# Altium PCB Mobo.PcbDoc (part 3 of 3)
Units mm, origin at the board's own origin, x right, y up, seen from the top; angles counter-clockwise.
Board outline 192.03 x 94.33 mm, 5 copper layers (Top Layer, POWER, InternalPlane2, GND, Bottom Layer); 327 components, 282 nets, 956 pads, 380 vias.
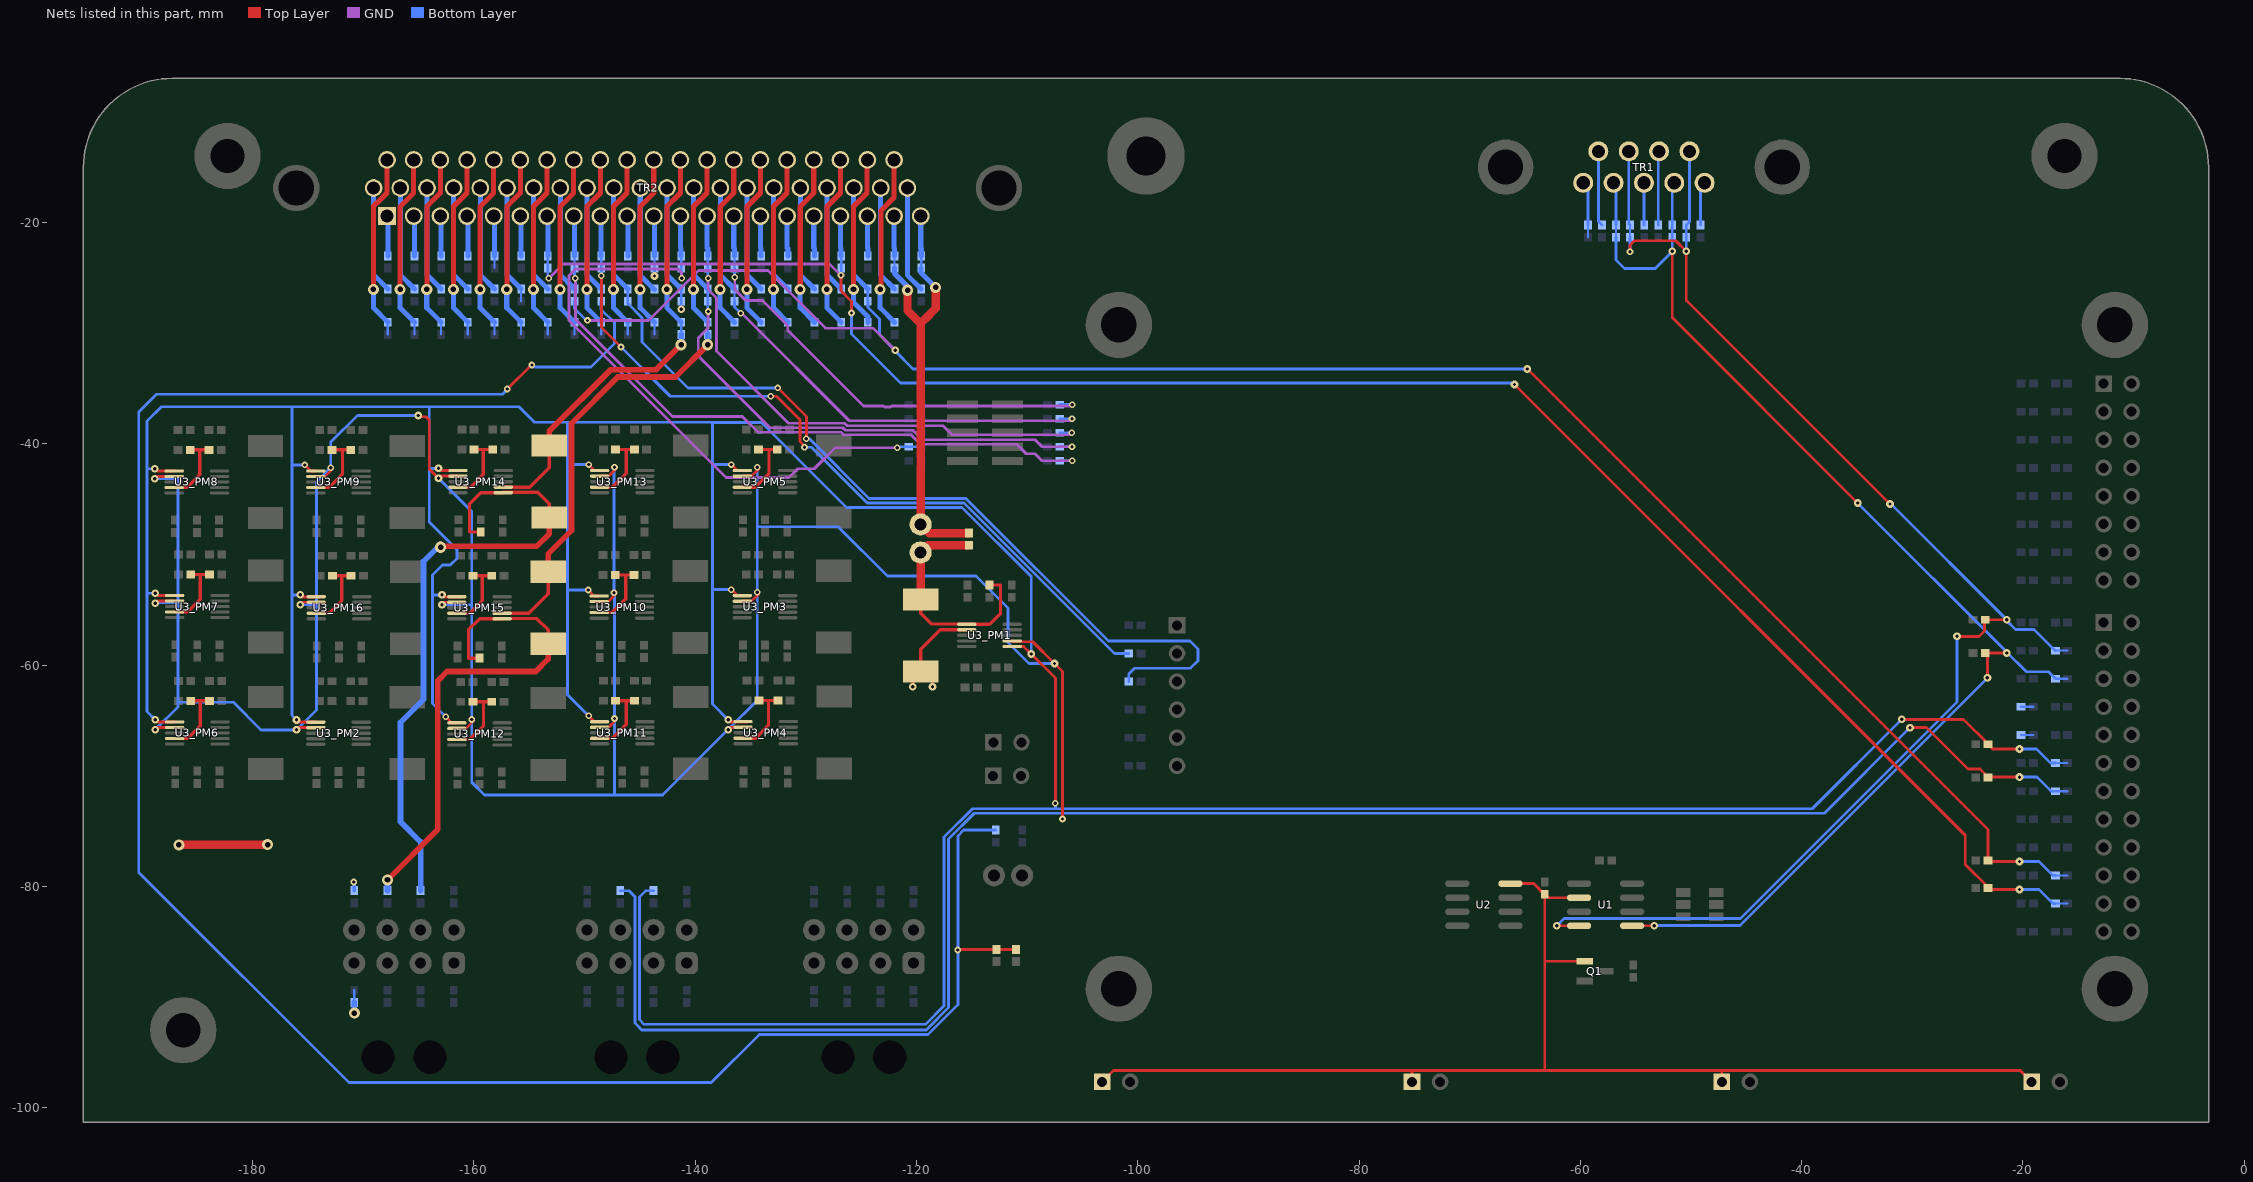
[diagram p6: the nets of this part, all layers, seen from the top]

## Via types
v1: diameter 0.7, hole 0.3, Top Layer to Bottom Layer, tented both sides, 256 vias
v2: diameter 1, hole 0.5, Top Layer to Bottom Layer, tented both sides, 61 vias
v3: diameter 0.6, hole 0.3, Top Layer to Bottom Layer, tented both sides, 37 vias
v4: diameter 0.6, hole 0.3, Top Layer to Bottom Layer, tented bottom, 20 vias
v5: diameter 0.7, hole 0.3, Top Layer to Bottom Layer, tented top, 5 vias
v6: diameter 0.5, hole 0.3, Top Layer to Bottom Layer, tented both sides, 1 vias

## Nets (pads, with @x,y where several pads share a name; then routed paths per layer and width w, separated by ;. In a path a pad name is that pad's centre, name@x,y a point inside that pad or via, vN(x,y) a via of type N, cw(c..) or ccw(c..) an arc to the next point about the centre after c; other vN are vias at no path point) (continued)
NetR16_PM4_2: R16_PM4.2 R17_PM4.1 U3_PM4.9 | length 6.7
  Top Layer w0.3: U3_PM4.9@-135.666,-66.611 -134.516,-66.611 -133.366,-65.461 -133.366,-63.211 ; R16_PM4.2@-134.216,-63.211 -133.366,-63.211 ; R17_PM4.1@-132.516,-63.211 -133.366,-63.211
NetR16_PM5_2: R16_PM5.2 R17_PM5.1 U3_PM5.9 | length 6.8
  Top Layer w0.3: U3_PM5.9@-135.725,-43.929 -134.575,-43.929 -133.316,-42.67 -133.316,-40.529 ; R16_PM5.2@-134.275,-40.529 -133.425,-40.529 R17_PM5.1@-132.575,-40.529
NetR16_PM6_2: R16_PM6.2 R17_PM6.1 U3_PM6.9 | length 6.7
  Top Layer w0.3: U3_PM6.9@-187.025,-66.644 -185.875,-66.644 -184.725,-65.494 -184.725,-63.244 ; R16_PM6.2@-185.575,-63.244 -184.725,-63.244 ; R17_PM6.1@-183.875,-63.244 -184.725,-63.244
NetR16_PM7_2: R16_PM7.2 R17_PM7.1 U3_PM7.9 | length 6.7
  Top Layer w0.3: U3_PM7.9@-187.025,-55.214 -185.875,-55.214 -184.725,-54.064 -184.725,-51.814 ; R16_PM7.2@-185.575,-51.814 -184.725,-51.814 ; R17_PM7.1@-183.875,-51.814 -184.725,-51.814
NetR16_PM8_2: R16_PM8.2 R17_PM8.1 U3_PM8.9 | length 6.7
  Top Layer w0.3: U3_PM8.9@-187.066,-43.961 -185.916,-43.961 -184.766,-42.811 -184.766,-40.561 ; R16_PM8.2@-185.616,-40.561 -184.766,-40.561 ; R17_PM8.1@-183.916,-40.561 -184.766,-40.561
NetR16_PM9_2: R16_PM9.2 R17_PM9.1 U3_PM9.9 | length 6.9
  Top Layer w0.3: U3_PM9.9@-174.266,-43.961 -173.116,-43.961 -171.857,-42.702 -171.857,-40.561 ; R16_PM9.2@-172.816,-40.561 -171.966,-40.561 ; -171.864,-40.663 -171.966,-40.561 ; R17_PM9.1@-171.116,-40.561 -171.966,-40.561
NetR16_PM10_2: R16_PM10.2 R17_PM10.1 U3_PM10.9 | length 6.8
  Top Layer w0.3: U3_PM10.9@-148.666,-55.261 -147.516,-55.261 -146.257,-54.002 -146.257,-51.861 ; R16_PM10.2@-147.216,-51.861 -146.366,-51.861 R17_PM10.1@-145.516,-51.861
NetR16_PM11_2: R16_PM11.2 R17_PM11.1 U3_PM11.9 | length 6.8
  Top Layer w0.3: U3_PM11.9@-148.625,-66.629 -147.475,-66.629 -146.216,-65.37 -146.216,-63.229 ; R16_PM11.2@-147.175,-63.229 R17_PM11.1@-145.475,-63.229
NetR16_PM12_2: R16_PM12.2 R17_PM12.1 U3_PM12.9 | length 6.7
  Top Layer w0.3: U3_PM12.9@-161.525,-66.729 -160.375,-66.729 -159.116,-65.47 -159.116,-63.329 R17_PM12.1@-158.375,-63.329 ; R16_PM12.2@-160.075,-63.329 -159.225,-63.329
NetR16_PM13_2: R16_PM13.2 R17_PM13.1 U3_PM13.9 | length 6.8
  Top Layer w0.3: U3_PM13.9@-148.625,-43.929 -147.475,-43.929 -146.216,-42.67 -146.216,-40.529 ; R16_PM13.2@-147.175,-40.529 -146.325,-40.529 R17_PM13.1@-145.475,-40.529
NetR16_PM14_2: R16_PM14.2 R17_PM14.1 U3_PM14.9 | length 6.7
  Top Layer w0.3: U3_PM14.9@-161.425,-43.929 -160.275,-43.929 -159.125,-42.779 -159.125,-40.529 ; R16_PM14.2@-159.975,-40.529 -159.125,-40.529 ; R17_PM14.1@-158.275,-40.529 -159.125,-40.529
NetR16_PM15_2: R16_PM15.2 R17_PM15.1 U3_PM15.9 | length 6.7
  Top Layer w0.3: U3_PM15.9@-161.525,-55.329 -160.375,-55.329 -159.225,-54.179 -159.225,-51.929 ; R16_PM15.2@-160.075,-51.929 -159.225,-51.929 ; R17_PM15.1@-158.375,-51.929 -159.225,-51.929
NetR16_PM16_2: R16_PM16.2 R17_PM16.1 U3_PM16.9 | length 6.7
  Top Layer w0.3: U3_PM16.9@-174.225,-55.329 -173.075,-55.329 -171.925,-54.179 -171.925,-51.929 ; R16_PM16.2@-172.775,-51.929 -171.925,-51.929 ; R17_PM16.1@-171.075,-51.929 -171.925,-51.929
NetTR1_1: TR1.1 Z29.1 | length 4
  Bottom Layer w0.254: TR1.1@-59.743,-16.428 -59.313,-16.858 Z29.1@-59.313,-20.252
NetTR1_2: TR1.2 Z27.1 | length 3.9
  Bottom Layer w0.254: TR1.2@-57,-16.428 -56.773,-16.655 Z27.1@-56.773,-20.252
NetTR1_3: TR1.3 Z25.1 | length 3.8
  Bottom Layer w0.254: TR1.3@-54.257,-16.428 -54.257,-20.228 Z25.1@-54.233,-20.252
NetTR1_4: TR1.4 Z23.1 | length 3.9
  Bottom Layer w0.254: Z23.1@-51.693,-20.252 -51.693,-16.608 TR1.4@-51.514,-16.428
NetTR1_5: TR1.5 Z21.1 | length 4
  Bottom Layer w0.254: Z21.1@-49.153,-20.252 -49.153,-16.811 TR1.5@-48.77,-16.428
NetTR1_6: TR1.6 Z28.1 | length 6.8
  Bottom Layer w0.254: TR1.6@-58.372,-13.584 -58.372,-19.924 Z28.1@-58.043,-20.252
NetTR1_7: TR1.7 Z26.1 | length 6.7
  Bottom Layer w0.254: TR1.7@-55.628,-13.584 -55.628,-20.127 Z26.1@-55.503,-20.252
NetTR1_8: TR1.8 Z24.1 | length 6.7
  Bottom Layer w0.254: Z24.1@-52.963,-20.252 -52.963,-13.662 TR1.8@-52.885,-13.584
NetTR1_9: TR1.9 Z22.1 | length 6.8
  Bottom Layer w0.254: Z22.1@-50.423,-20.252 -50.142,-19.971 TR1.9@-50.142,-13.584
NetTR2_1: TR2.1 Z70.1 | length 3.6
  Bottom Layer w0.457: TR2.1@-167.834,-19.434 -167.765,-19.503 Z70.1@-167.765,-23.025
NetTR2_2: TR2.2 Z68.1 | length 3.6
  Bottom Layer w0.457: TR2.2@-165.424,-19.434 -165.355,-19.503 Z68.1@-165.355,-23.025
NetTR2_3: TR2.3 Z66.1 | length 3.6
  Bottom Layer w0.457: TR2.3@-163.014,-19.434 -162.945,-19.503 Z66.1@-162.945,-23.025
NetTR2_4: TR2.4 Z64.1 | length 3.6
  Bottom Layer w0.457: TR2.4@-160.604,-19.434 -160.535,-19.503 Z64.1@-160.535,-23.025
NetTR2_5: TR2.5 Z62.1 | length 3.6
  Bottom Layer w0.457: TR2.5@-158.194,-19.434 -158.125,-19.503 Z62.1@-158.125,-23.025
NetTR2_6: TR2.6 Z60.1 | length 3.6
  Bottom Layer w0.457: TR2.6@-155.784,-19.434 -155.715,-19.503 Z60.1@-155.715,-23.025
NetTR2_7: TR2.7 Z58.1 | length 3.6
  Bottom Layer w0.457: TR2.7@-153.374,-19.434 -153.305,-19.503 Z58.1@-153.305,-23.025
NetTR2_8: TR2.8 Z56.1 | length 3.6
  Bottom Layer w0.457: TR2.8@-150.964,-19.434 -150.895,-19.503 Z56.1@-150.895,-23.025
NetTR2_9: TR2.9 Z54.1 | length 3.6
  Bottom Layer w0.457: TR2.9@-148.554,-19.434 -148.485,-19.503 Z54.1@-148.485,-23.025
NetTR2_10: TR2.10 Z52.1 | length 3.6
  Bottom Layer w0.457: TR2.10@-146.144,-19.434 -146.075,-19.503 Z52.1@-146.075,-23.025
NetTR2_11: TR2.11 Z50.1 | length 3.6
  Bottom Layer w0.457: TR2.11@-143.734,-19.434 -143.665,-19.503 Z50.1@-143.665,-23.025
NetTR2_12: TR2.12 Z48.1 | length 3.6
  Bottom Layer w0.457: TR2.12@-141.324,-19.434 -141.324,-22.3 -141.255,-22.369 Z48.1@-141.255,-23.025
NetTR2_13: TR2.13 Z46.1 | length 3.6
  Bottom Layer w0.457: TR2.13@-138.914,-19.434 -138.914,-22.3 -138.845,-22.369 Z46.1@-138.845,-23.025
NetTR2_14: TR2.14 Z44.1 | length 3.6
  Bottom Layer w0.457: TR2.14@-136.504,-19.434 -136.504,-22.3 -136.435,-22.369 Z44.1@-136.435,-23.025
NetTR2_15: TR2.15 Z42.1 | length 3.6
  Bottom Layer w0.457: TR2.15@-134.094,-19.434 -134.094,-22.3 -134.025,-22.369 Z42.1@-134.025,-23.025
NetTR2_16: TR2.16 Z40.1 | length 3.6
  Bottom Layer w0.457: TR2.16@-131.684,-19.434 -131.684,-22.3 -131.615,-22.369 Z40.1@-131.615,-23.025
NetTR2_17: TR2.17 Z38.1 | length 3.6
  Bottom Layer w0.457: TR2.17@-129.274,-19.434 -129.274,-22.3 -129.205,-22.369 Z38.1@-129.205,-23.025
NetTR2_18: TR2.18 Z36.1 | length 3.6
  Bottom Layer w0.457: TR2.18@-126.864,-19.434 -126.864,-22.3 -126.795,-22.369 Z36.1@-126.795,-23.025
NetTR2_19: TR2.19 Z34.1 | length 3.6
  Bottom Layer w0.457: TR2.19@-124.424,-19.434 -124.424,-22.33 -124.385,-22.369 Z34.1@-124.385,-23.025
NetTR2_20: TR2.20 Z32.1 | length 3.6
  Bottom Layer w0.457: TR2.20@-122.014,-19.434 -122.014,-22.33 -121.975,-22.369 Z32.1@-121.975,-23.025
NetTR2_21: TR2.21 Z30.1 | length 3.6
  Bottom Layer w0.508: TR2.21@-119.604,-19.434 -119.604,-22.33 -119.565,-22.369 Z30.1@-119.565,-23.025
NetTR2_22: TR2.22 Z71.1 | length 9.7
  Bottom Layer w0.457: TR2.22@-169.044,-16.894 -169.044,-24.746 Z71.1@-167.765,-26.025
NetTR2_23: TR2.23 Z69.1 | length 9.7
  Bottom Layer w0.457: TR2.23@-166.634,-16.894 -166.634,-24.746 Z69.1@-165.355,-26.025
NetTR2_24: TR2.24 Z67.1 | length 9.7
  Bottom Layer w0.457: TR2.24@-164.224,-16.894 -164.224,-24.746 Z67.1@-162.945,-26.025
NetTR2_25: TR2.25 Z65.1 | length 9.7
  Bottom Layer w0.457: TR2.25@-161.814,-16.894 -161.814,-24.746 Z65.1@-160.535,-26.025
NetTR2_26: TR2.26 Z63.1 | length 9.7
  Bottom Layer w0.457: TR2.26@-159.404,-16.894 -159.404,-24.746 Z63.1@-158.125,-26.025
NetTR2_27: TR2.27 Z61.1 | length 9.7
  Bottom Layer w0.457: TR2.27@-156.994,-16.894 -156.994,-24.746 Z61.1@-155.715,-26.025
NetTR2_28: TR2.28 Z59.1 | length 9.7
  Bottom Layer w0.457: TR2.28@-154.584,-16.894 -154.584,-24.746 Z59.1@-153.305,-26.025
NetTR2_29: TR2.29 Z57.1 | length 9.7
  Bottom Layer w0.457: TR2.29@-152.174,-16.894 -152.174,-24.746 Z57.1@-150.895,-26.025
NetTR2_30: TR2.30 Z55.1 | length 9.7
  Bottom Layer w0.457: TR2.30@-149.764,-16.894 -149.764,-24.746 Z55.1@-148.485,-26.025
NetTR2_31: TR2.31 Z53.1 | length 9.7
  Bottom Layer w0.457: TR2.31@-147.354,-16.894 -147.354,-24.746 Z53.1@-146.075,-26.025
NetTR2_32: TR2.32 Z51.1 | length 9.7
  Bottom Layer w0.457: TR2.32@-144.954,-16.944 -144.954,-24.796 Z51.1@-143.675,-26.075
NetTR2_33: TR2.33 Z49.1 | length 9.7
  Bottom Layer w0.457: TR2.33@-142.534,-16.894 -142.534,-24.746 Z49.1@-141.255,-26.025
NetTR2_34: TR2.34 Z47.1 | length 9.7
  Bottom Layer w0.457: TR2.34@-140.124,-16.894 -140.124,-24.746 Z47.1@-138.845,-26.025
NetTR2_35: TR2.35 Z45.1 | length 9.7
  Bottom Layer w0.457: TR2.35@-137.714,-16.894 -137.714,-24.746 Z45.1@-136.435,-26.025
NetTR2_36: TR2.36 Z43.1 | length 9.7
  Bottom Layer w0.457: TR2.36@-135.304,-16.894 -135.304,-24.746 Z43.1@-134.025,-26.025
NetTR2_37: TR2.37 Z41.1 | length 9.7
  Bottom Layer w0.457: TR2.37@-132.894,-16.894 -132.894,-24.746 Z41.1@-131.615,-26.025
NetTR2_38: TR2.38 Z39.1 | length 9.7
  Bottom Layer w0.457: TR2.38@-130.484,-16.894 -130.484,-24.746 Z39.1@-129.205,-26.025
NetTR2_39: TR2.39 Z37.1 | length 9.7
  Bottom Layer w0.457: TR2.39@-128.074,-16.894 -128.074,-24.746 Z37.1@-126.795,-26.025
NetTR2_40: TR2.40 Z35.1 | length 9.7
  Bottom Layer w0.457: TR2.40@-125.664,-16.894 -125.664,-24.746 Z35.1@-124.385,-26.025
NetTR2_41: TR2.41 Z33.1 | length 9.6
  Bottom Layer w0.457: TR2.41@-123.224,-16.894 -123.224,-24.776 Z33.1@-121.975,-26.025
NetTR2_42: TR2.42 Z31.1 | length 9.6
  Bottom Layer w0.457: TR2.42@-120.814,-16.894 -120.814,-24.776 Z31.1@-119.565,-26.025
NetTR2_43: TR2.43 Z20.2 | length 15.7
  Top Layer w0.457: v2@-169.055,-26.045 -169.055,-18.516 -168.792,-18.253 -168.733,-18.253 -167.834,-17.354 TR2.43@-167.834,-14.354
  Bottom Layer w0.457: v2(-169.063,-26.053) -169.063,-27.727 Z20.2@-167.765,-29.025
NetTR2_44: TR2.44 Z19.2 | length 15.7
  Top Layer w0.457: v2(-166.653,-26.053) -166.645,-26.045 -166.645,-18.575 -165.424,-17.354 TR2.44@-165.424,-14.354
  Bottom Layer w0.457: v2(-166.653,-26.053) -166.653,-27.727 Z19.2@-165.355,-29.025
NetTR2_45: TR2.45 Z18.2 | length 15.7
  Top Layer w0.457: v2@-164.235,-26.045 -164.235,-18.575 -163.014,-17.354 TR2.45@-163.014,-14.354
  Bottom Layer w0.457: v2(-164.243,-26.053) -164.243,-27.727 Z18.2@-162.945,-29.025
NetTR2_46: TR2.46 Z17.2 | length 15.7
  Top Layer w0.457: v2@-161.825,-26.045 -161.825,-18.575 -160.604,-17.354 TR2.46@-160.604,-14.354
  Bottom Layer w0.457: v2(-161.833,-26.053) -161.833,-27.727 Z17.2@-160.535,-29.025
NetTR2_47: TR2.47 Z16.2 | length 15.7
  Top Layer w0.457: v2@-159.415,-26.045 -159.415,-18.575 -158.194,-17.354 TR2.47@-158.194,-14.354
  Bottom Layer w0.457: v2(-159.423,-26.053) -159.423,-27.727 Z16.2@-158.125,-29.025
NetTR2_48: TR2.48 Z15.2 | length 15.7
  Top Layer w0.457: v2@-157.005,-26.045 -157.005,-18.575 -155.784,-17.354 TR2.48@-155.784,-14.354
  Bottom Layer w0.457: v2(-157.013,-26.053) -157.013,-27.727 Z15.2@-155.715,-29.025
NetTR2_49: TR2.49 Z14.2 | length 15.7
  Top Layer w0.457: v2@-154.595,-26.045 -154.595,-18.575 -153.374,-17.354 TR2.49@-153.374,-14.354
  Bottom Layer w0.457: v2(-154.603,-26.053) -154.603,-27.727 Z14.2@-153.305,-29.025
NetTR2_50: TR2.50 Z13.2 | length 15.7
  Top Layer w0.457: v2@-152.185,-26.045 -152.185,-18.575 -150.964,-17.354 TR2.50@-150.964,-14.354
  Bottom Layer w0.457: v2(-152.193,-26.053) -152.193,-27.727 Z13.2@-150.895,-29.025
NetTR2_51: TR2.51 Z12.2 | length 15.7
  Top Layer w0.457: v2@-149.775,-26.045 -149.775,-18.575 -148.554,-17.354 TR2.51@-148.554,-14.354
  Bottom Layer w0.457: v2(-149.783,-26.053) -149.783,-27.727 Z12.2@-148.485,-29.025
NetTR2_52: TR2.52 Z11.2 | length 15.7
  Top Layer w0.457: v2@-147.365,-26.045 -147.365,-18.575 -146.144,-17.354 TR2.52@-146.144,-14.354
  Bottom Layer w0.457: v2(-147.373,-26.053) -147.373,-27.727 Z11.2@-146.075,-29.025
NetTR2_53: TR2.53 Z10.2 | length 15.7
  Top Layer w0.457: v2@-144.955,-26.045 -144.955,-18.575 -143.734,-17.354 TR2.53@-143.734,-14.354
  Bottom Layer w0.457: v2(-144.963,-26.053) -144.963,-27.727 Z10.2@-143.665,-29.025
NetTR2_54: TR2.54 Z9.2 | length 15.7
  Top Layer w0.457: v2@-142.545,-26.045 -142.545,-18.575 -141.324,-17.354 TR2.54@-141.324,-14.354
  Bottom Layer w0.457: v2(-142.553,-26.053) -142.553,-27.727 Z9.2@-141.255,-29.025
NetTR2_55: TR2.55 Z8.2 | length 15.7
  Top Layer w0.457: v2@-140.135,-26.045 -140.135,-18.575 -138.914,-17.354 TR2.55@-138.914,-14.354
  Bottom Layer w0.457: v2(-140.143,-26.053) -140.143,-27.727 Z8.2@-138.845,-29.025
NetTR2_56: TR2.56 Z7.2 | length 15.7
  Top Layer w0.457: v2@-137.725,-26.045 -137.725,-18.575 -136.504,-17.354 TR2.56@-136.504,-14.354
  Bottom Layer w0.457: v2(-137.733,-26.053) -137.733,-27.727 Z7.2@-136.435,-29.025
NetTR2_57: TR2.57 Z6.2 | length 15.7
  Top Layer w0.457: v2@-135.315,-26.045 -135.315,-18.575 -134.094,-17.354 TR2.57@-134.094,-14.354
  Bottom Layer w0.457: v2(-135.323,-26.053) -135.323,-27.727 Z6.2@-134.025,-29.025
NetTR2_58: TR2.58 Z5.2 | length 15.7
  Top Layer w0.457: v2@-132.905,-26.045 -132.905,-18.575 -131.684,-17.354 TR2.58@-131.684,-14.354
  Bottom Layer w0.457: v2(-132.913,-26.053) -132.913,-27.727 Z5.2@-131.615,-29.025
NetTR2_59: TR2.59 Z4.2 | length 15.7
  Top Layer w0.457: v2@-130.495,-26.045 -130.495,-18.575 -129.274,-17.354 TR2.59@-129.274,-14.354
  Bottom Layer w0.457: v2(-130.503,-26.053) -130.503,-27.727 Z4.2@-129.205,-29.025
NetTR2_60: TR2.60 Z3.2 | length 15.7
  Top Layer w0.457: v2@-128.085,-26.045 -128.085,-18.575 -126.864,-17.354 TR2.60@-126.864,-14.354
  Bottom Layer w0.457: v2(-128.093,-26.053) -128.093,-27.727 Z3.2@-126.795,-29.025
NetTR2_61: TR2.61 Z2.2 | length 15.4
  Top Layer w0.457: v2@-125.675,-25.707 -125.675,-18.575 -124.454,-17.354 TR2.61@-124.454,-14.354
  Bottom Layer w0.457: v2(-125.683,-26.053) -125.683,-27.219 -124.385,-28.517 Z2.2@-124.385,-29.025
NetTR2_62: TR2.62 Z1.2 | length 15.7
  Top Layer w0.457: v2(-123.273,-26.053) -123.195,-25.975 -123.195,-18.945 -122.014,-17.764 TR2.62@-122.014,-14.354
  Bottom Layer w0.457: v2(-123.273,-26.053) -123.273,-27.727 Z1.2@-121.975,-29.025
ONEWIRE: J2.1 J3.1 J4.1 J5.1 Q1.1 R8.1 U1.2 U2.4 | length 113
  Top Layer w0.254: J5.1@-103.216,-97.661 -102.187,-96.632 -75.216,-96.632 ; J4.1@-75.216,-97.661 -75.216,-96.632 ; U2.4@-66.316,-79.756 -64.216,-79.756 -63.261,-80.711 R8.1@-63.216,-80.711 ; -63.106,-86.771 Q1.1@-59.616,-86.771 ; U1.2@-60.116,-81.026 -62.901,-81.026 R8.1@-63.216,-80.711 ; J3.1@-47.216,-97.661 -47.216,-96.632 ; J2.1@-19.216,-97.661 -20.246,-96.632 -47.216,-96.632 ; -75.216,-96.632 -63.216,-96.632 ; -63.216,-96.632 R8.1@-63.216,-80.711 ; -63.216,-96.632 -47.216,-96.632
PL_SCL: R2.2 Z35.2 Z57.2 Z138.2 | length 166.5
  Top Layer w0.254: v1(-64.792,-33.25) -23.166,-74.876 R2.2@-23.166,-77.661 -23.076,-77.751 v1(-20.311,-77.751)
  GND w0.254: v4(-149.716,-28.861) -144.197,-28.861 -139.697,-24.361 -133.416,-24.361 -128.216,-29.561 -123.916,-29.561 v1(-121.916,-31.561)
  Bottom Layer w0.254: Z57.2@-150.895,-27.125 -150.895,-27.782 -149.816,-28.861 v4(-149.716,-28.861) ; Z35.2@-124.385,-27.125 -124.385,-27.692 -123.339,-28.738 -123.339,-30.138 v1(-121.916,-31.561) ; v1@-121.948,-31.593 -120.291,-33.25 v1(-64.792,-33.25) ; v1(-20.311,-77.751) -18.558,-77.751 -17.288,-79.021 Z138.2@-17.076,-79.021
PL_SDA: R3.2 Z36.2 Z58.2 Z139.2 | length 166.5
  Top Layer w0.254: v3(-126.816,-24.786) -126.816,-26.186 -125.866,-27.136 v3(-125.866,-28.186) ; v1(-65.955,-34.647) -25.216,-75.386 -25.216,-78.02 -23.166,-80.07 R3.2@-23.166,-80.161 -23.036,-80.291 v1(-20.311,-80.291)
  GND w0.254: v3(-153.226,-25.061) -151.926,-23.761 -127.841,-23.761 v3(-126.816,-24.786)
  Bottom Layer w0.254: Z58.2@-153.305,-24.125 -153.305,-25.04 -153.326,-25.061 v3(-153.226,-25.061) ; v3(-126.816,-24.786) -126.795,-24.765 Z36.2@-126.795,-24.125 ; v3(-125.866,-28.186) -125.867,-28.187 -125.867,-30.087 -121.435,-34.519 -66.084,-34.519 v1(-65.955,-34.647) ; v1(-20.311,-80.291) -18.558,-80.291 -17.288,-81.561 Z139.2@-17.076,-81.561
PWR_SCL: R4.2 U3_PM1.6 U3_PM2.6 U3_PM3.6 U3_PM4.6 U3_PM5.6 U3_PM6.6 U3_PM7.6 U3_PM8.6 U3_PM9.6 U3_PM10.6 U3_PM11.6 U3_PM12.6 U3_PM13.6 U3_PM14.6 U3_PM15.6 U3_PM16.6 Z83.1 Z140.2 | length 451.8
  Top Layer w0.254: v1(-188.816,-42.261) -188.716,-42.161 v1@-188.716,-42.261 ; v1(-188.775,-64.944) -188.675,-64.844 -188.675,-65.044 -188.575,-65.144 U3_PM6.6@-187.025,-65.144 ; v1(-188.775,-53.514) -188.675,-53.414 v1@-188.675,-53.514 ; v1@-188.716,-42.361 -188.616,-42.461 U3_PM8.6@-187.066,-42.461 ; v1@-188.675,-53.614 -188.575,-53.714 U3_PM7.6@-187.025,-53.714 ; v1(-176.016,-64.961) -175.916,-64.861 v1@-175.916,-64.961 ; v1@-175.916,-65.061 -175.816,-65.161 U3_PM2.6@-174.266,-65.161 ; v1(-175.666,-53.661) -175.566,-53.561 v1@-175.566,-53.661 ; v1@-175.566,-53.761 -175.466,-53.861 U3_PM16.6@-173.916,-53.861 ; v4@-175.416,-41.861 v4@-175.316,-41.861 ; v4(-175.257,-41.92) -174.716,-42.461 U3_PM9.6@-174.266,-42.461 ; v1(-163.175,-42.229) -163.075,-42.129 v1@-163.075,-42.229 ; v1@-163.075,-42.329 -162.975,-42.429 U3_PM14.6@-161.425,-42.429 ; v1(-162.866,-53.661) -162.766,-53.561 v1@-162.766,-53.661 ; v1@-162.766,-53.761 -162.666,-53.861 U3_PM15.6@-161.116,-53.861 ; v4(-162.516,-64.688) -161.975,-65.229 U3_PM12.6@-161.525,-65.229 ; v4@-149.816,-53.161 v4@-149.716,-53.161 ; v4@-149.775,-64.529 v4@-149.675,-64.529 ; v4@-149.775,-41.829 v4@-149.675,-41.829 ; v4(-149.657,-53.22) -149.116,-53.761 U3_PM10.6@-148.666,-53.761 ; v4(-149.616,-64.588) -149.075,-65.129 U3_PM11.6@-148.625,-65.129 ; v4(-149.616,-41.888) -149.075,-42.429 U3_PM13.6@-148.625,-42.429 ; v1(-137.007,-64.943) -136.907,-64.843 v1@-136.907,-64.943 ; v1@-136.907,-65.043 -136.807,-65.143 U3_PM4.6@-135.257,-65.143 ; v4@-136.875,-53.129 v4@-136.775,-53.129 ; v4@-136.875,-41.829 v4@-136.775,-41.829 ; v4(-136.716,-53.188) -136.175,-53.729 U3_PM3.6@-135.725,-53.729 ; v4(-136.716,-41.888) -136.175,-42.429 U3_PM5.6@-135.725,-42.429 ; U3_PM1.6@-111.341,-58.324 -110.303,-58.324 v1(-109.616,-59.011) -107.441,-61.186 v3(-107.441,-72.486) ; v1(-30.966,-64.911) -25.371,-64.911 -23.166,-67.116 R4.2@-23.166,-67.161 -22.736,-67.591 v1(-20.311,-67.591)
  Bottom Layer w0.254: v1(-188.816,-42.261) -189.516,-42.261 ; v1(-188.775,-64.944) -189.516,-64.203 -189.516,-53.561 ; v1(-188.775,-53.514) -189.469,-53.514 -189.516,-53.561 ; v1(-176.016,-64.961) -176.416,-64.561 -176.416,-53.661 ; v1(-175.666,-53.661) -176.416,-53.661 ; v4(-175.257,-41.92) -176.375,-41.92 -176.416,-41.961 ; v1(-163.175,-42.229) -163.984,-42.229 -164.016,-42.261 ; v1(-162.866,-53.661) -163.716,-53.661 ; v4(-162.516,-64.688) -163.716,-63.488 -163.716,-53.661 ; v4(-149.657,-53.22) -151.475,-53.22 -151.516,-53.261 ; v4(-149.616,-64.588) -151.516,-62.688 -151.516,-53.261 ; v4(-149.616,-41.888) -151.443,-41.888 -151.516,-41.961 ; Z83.1@-143.75,-80.391 -144.446,-80.391 -145.029,-80.974 -145.029,-92.048 -144.606,-92.471 -119.176,-92.471 -117.498,-90.793 -117.498,-75.543 -114.941,-72.986 -107.416,-72.986 ; v1(-137.007,-64.943) -138.416,-63.534 -138.416,-53.161 ; v4(-136.716,-53.188) -138.389,-53.188 -138.416,-53.161 ; v4(-136.716,-41.888) -138.389,-41.888 -138.416,-41.861 ; v1(-109.616,-59.011) -109.616,-52.01 -115.871,-45.755 -126.322,-45.755 -133.996,-38.082 -138.396,-38.082 -138.416,-38.061 ; v3(-107.441,-72.486) -107.416,-72.511 -107.416,-72.986 ; v1(-30.966,-64.911) -39.041,-72.986 -107.416,-72.986 ; v1(-20.311,-67.591) -18.786,-67.591 -17.516,-68.861 Z140.2@-17.076,-68.861 ; -189.516,-53.561 -189.516,-42.261 ; -189.516,-42.261 -189.516,-37.961 -188.216,-36.661 -176.416,-36.661 ; -176.416,-53.661 -176.416,-41.961 ; -176.416,-41.961 -176.416,-36.661 ; -176.416,-36.661 -164.016,-36.661 ; -164.016,-42.261 -164.016,-36.661 ; -164.016,-42.261 -164.016,-47.084 -161.516,-49.584 -161.516,-50.361 -162.116,-50.961 -162.816,-50.961 -163.716,-51.861 -163.716,-53.661 ; -164.016,-36.661 -155.916,-36.661 -154.516,-38.061 -151.516,-38.061 ; -151.516,-53.261 -151.516,-41.961 ; -151.516,-41.961 -151.516,-38.061 ; -151.516,-38.061 -138.416,-38.061 ; -138.416,-53.161 -138.416,-41.861 ; -138.416,-41.861 -138.416,-38.061
PWR_SDA: R5.2 U3_PM1.7 U3_PM2.7 U3_PM3.7 U3_PM4.7 U3_PM5.7 U3_PM6.7 U3_PM7.7 U3_PM8.7 U3_PM9.7 U3_PM10.7 U3_PM11.7 U3_PM12.7 U3_PM13.7 U3_PM14.7 U3_PM15.7 U3_PM16.7 Z85.1 Z141.2 | length 441
  Top Layer w0.254: v1(-188.816,-43.161) -188.616,-42.961 U3_PM8.7@-187.066,-42.961 ; v1(-188.775,-65.844) -188.575,-65.644 U3_PM6.7@-187.025,-65.644 ; v1(-188.775,-54.414) -188.575,-54.214 U3_PM7.7@-187.025,-54.214 ; v1(-176.016,-65.861) -175.816,-65.661 U3_PM2.7@-174.266,-65.661 ; v1(-175.666,-54.561) -175.434,-54.329 U3_PM16.7@-174.225,-54.329 ; U3_PM9.7@-174.266,-42.961 -173.434,-42.961 -172.816,-42.343 -172.816,-42.161 v4(-172.919,-42.161) ; U3_PM16.7@-174.225,-54.361 U3_PM16.7@-173.916,-54.361 ; v1(-165.016,-37.461) -165.016,-37.561 -164.316,-37.561 -164.016,-37.861 -164.016,-42.288 v1(-163.175,-43.129) -162.975,-42.929 U3_PM14.7@-161.425,-42.929 ; v1@-162.666,-54.361 -162.634,-54.329 U3_PM15.7@-161.525,-54.329 ; U3_PM12.7@-161.525,-65.729 -160.693,-65.729 v4@-160.075,-65.111 ; U3_PM15.7@-161.525,-54.361 U3_PM15.7@-161.116,-54.361 ; v4(-160.178,-64.929) v4@-160.075,-64.929 ; U3_PM10.7@-148.666,-54.261 -147.834,-54.261 v4@-147.216,-53.643 ; U3_PM11.7@-148.625,-65.629 -147.793,-65.629 v4@-147.175,-65.011 ; U3_PM13.7@-148.625,-42.929 -147.793,-42.929 -147.175,-42.311 -147.175,-42.129 v4(-147.278,-42.129) ; v4(-147.278,-64.829) v4@-147.175,-64.829 ; v1(-137.007,-65.843) -136.807,-65.643 U3_PM4.7@-135.257,-65.643 ; U3_PM3.7@-135.725,-54.229 -134.893,-54.229 v4@-134.275,-53.611 ; U3_PM5.7@-135.725,-42.929 -134.893,-42.929 -134.275,-42.311 -134.275,-42.129 v4(-134.378,-42.129) ; U3_PM1.7@-111.341,-57.824 -111.271,-57.895 -109.483,-57.895 v1(-107.516,-59.861) -106.791,-60.586 v3(-106.791,-73.911) ; v1(-30.216,-65.661) -28.716,-65.661 -24.966,-69.411 -23.871,-69.411 -23.151,-70.131 v1(-20.311,-70.131)
  Bottom Layer w0.254: v1(-188.816,-43.161) -186.716,-43.161 -186.716,-54.361 ; v1(-188.775,-65.844) -186.716,-63.785 -186.716,-63.461 ; v1(-188.775,-54.414) -188.722,-54.361 -186.716,-54.361 ; v1(-175.666,-54.561) -174.216,-54.561 ; v1(-165.016,-37.461) -170.516,-37.461 -172.919,-39.863 v4(-172.919,-42.161) -174.216,-43.459 -174.216,-54.561 ; v1(-163.175,-43.129) -160.178,-46.127 -160.178,-54.661 ; v1(-162.866,-54.561) -160.278,-54.561 -160.178,-54.661 ; v4(-147.278,-42.129) -147.319,-42.17 v4(-147.319,-53.461) -147.278,-53.502 v4(-147.278,-64.829) -147.278,-71.7 -147.216,-71.761 ; Z85.1@-146.75,-80.391 -145.986,-80.391 -145.436,-80.941 -145.436,-92.36 -144.817,-92.979 -119.109,-92.979 -117.091,-90.961 -117.091,-75.711 -114.773,-73.392 -106.841,-73.392 ; -134.378,-47.508 -127.069,-47.508 -122.616,-51.961 -114.616,-51.961 -111.716,-54.861 -111.716,-57.961 -109.816,-59.861 v1(-107.516,-59.861) ; v4(-134.378,-42.129) v4(-134.378,-53.429) -134.378,-63.213 v1(-137.007,-65.843) -142.925,-71.761 -147.216,-71.761 ; v3(-106.791,-73.911) -106.791,-73.442 -106.841,-73.392 ; v1(-30.216,-65.661) -37.948,-73.392 -106.841,-73.392 ; v1(-20.311,-70.131) -18.746,-70.131 Z141.2@-17.476,-71.401 ; -17.498,-71.401 Z141.2@-17.476,-71.401 ; Z141.2@-17.076,-71.401 Z141.2@-17.476,-71.401 ; -186.716,-63.461 -186.716,-54.361 ; -186.716,-63.461 -186.616,-63.361 -181.716,-63.361 -179.216,-65.861 v1(-176.016,-65.861) -174.216,-64.061 -174.216,-54.561 ; -160.178,-54.661 v4(-160.178,-64.929) -160.178,-70.6 -159.016,-71.761 -147.216,-71.761
TELEM_SCL: R6.2 U1.4 Z22.2 Z26.2 Z142.2 | length 117.9
  Top Layer w0.254: v1(-62.121,-83.566) U1.4@-60.116,-83.566 ; v4(-55.516,-22.661) -55.516,-22.061 -55.116,-21.661 -51.384,-21.661 v1(-50.423,-22.622) -50.423,-27.049 v1(-32.02,-45.452) ; v1(-25.966,-57.411) -23.966,-57.411 -23.466,-56.911 -23.466,-55.961 R6.2@-23.416,-55.911 v1(-21.466,-55.911)
  Bottom Layer w0.254: v1(-62.121,-83.566) -61.466,-82.911 -45.541,-82.911 -25.966,-63.336 v1(-25.966,-57.411) ; v4(-55.516,-22.661) -55.503,-22.648 Z26.2@-55.503,-21.352 ; v1(-50.423,-22.622) Z22.2@-50.423,-21.352 ; v1(-32.02,-45.452) -31.925,-45.452 v1(-21.466,-55.911) ; v1@-21.514,-55.959 -20.682,-56.79 -19.012,-56.79 -17.101,-58.701 Z142.2@-17.076,-58.701
TELEM_SDA: R7.2 U1.5 Z23.2 Z27.2 Z143.2 | length 109.2
  Top Layer w0.254: U1.5@-55.316,-83.566 v1(-53.311,-83.566) ; v1(-51.693,-22.622) -51.693,-28.614 v1(-34.941,-45.366) ; v1(-23.216,-61.161) -23.216,-59.111 R7.2@-23.416,-58.911 v1(-21.466,-58.911)
  Bottom Layer w0.254: Z27.2@-56.773,-21.352 -56.773,-23.404 -56.016,-24.161 -53.232,-24.161 v1(-51.693,-22.622) Z23.2@-51.693,-21.352 ; v1(-53.311,-83.566) -53.277,-83.532 -45.587,-83.532 v1(-23.216,-61.161) ; v1(-34.941,-45.366) -21.466,-58.841 v1(-21.466,-58.911) ; v1@-21.431,-58.876 -19.696,-60.612 -17.706,-60.612 Z143.2@-17.076,-61.241
UMB_EINT0: R18.2 R19.1 Z55.2 Z124.1 | length 200.6
  Top Layer w0.254: v3(-156.966,-35.061) -154.791,-32.886 v3(-154.741,-32.886) ; v4(-116.25,-85.75) -116.2,-85.7 R19.1@-112.75,-85.7 R18.2@-111,-85.7
  Bottom Layer w0.254: v3(-156.966,-35.061) -156.966,-35.086 -157.416,-35.536 -188.666,-35.536 -190.266,-37.136 -190.266,-78.736 -171.266,-97.736 -138.541,-97.736 -134.191,-93.385 -118.941,-93.385 -116.25,-90.695 v4(-116.25,-85.75) -116.25,-75.445 -115.726,-74.921 Z124.1@-112.828,-74.921 ; v3(-154.741,-32.886) -154.566,-33.061 -149.416,-33.061 -147.291,-30.936 -147.291,-29.061 -148.485,-27.867 Z55.2@-148.485,-27.125
UMB_IO0: Z146.2
UMB_IO1: Z147.2
UMB_RST: Z56.2 Z137.2 | length 56
  GND w0.254: v3(-150.816,-25.061) -150.816,-28.761 -142.034,-37.543 -135.734,-37.543 -134.316,-38.961 -126.816,-38.961 -126.583,-39.194 -120.483,-39.194 -119.63,-40.047 -110.93,-40.047 -110.067,-40.91 -109.265,-40.91 -108.624,-41.551 v3(-105.926,-41.551)
  Bottom Layer w0.254: Z56.2@-150.895,-24.125 -150.895,-25.04 -150.916,-25.061 v3(-150.816,-25.061) ; Z137.2@-107.038,-41.551 v3(-105.926,-41.551)
UMB_RTCK: Z48.2 Z97.1 | length 53.8
  GND w0.254: v3(-141.216,-25.061) -141.216,-24.515 -141.516,-24.215 -150.789,-24.215 -151.396,-24.821 -151.396,-28.882 -137.216,-43.061 -131.516,-43.061 -130.716,-42.261 -129.225,-42.261 -127.325,-40.361 v3(-121.716,-40.361)
  Bottom Layer w0.254: Z48.2@-141.255,-24.125 -141.255,-25.022 v3(-141.216,-25.061) ; v3(-121.716,-40.361) -121.636,-40.281 Z97.1@-120.688,-40.281
UMB_RX: Z54.2 Z103.1 | length 66.5
  Top Layer w0.254: v3(-148.466,-24.811) -148.466,-29.486 v3(-146.691,-31.261) ; v3(-133.166,-35.711) -132.641,-35.711 -130.519,-37.833 -130.519,-39.796 -130.115,-40.2 v3(-130.115,-40.331)
  Bottom Layer w0.254: Z54.2@-148.485,-24.125 -148.466,-24.144 v3(-148.466,-24.811) ; v3(-146.691,-31.261) -142.241,-35.711 v3(-133.166,-35.711) ; v3(-130.115,-40.331) -129.456,-40.331 -124.438,-45.349 -115.703,-45.349 -102.101,-58.951 Z103.1@-100.806,-58.951
UMB_TCK: Z45.2 Z135.2 | length 36.5
  GND w0.254: v3(-135.863,-28.208) -135.787,-28.208 -126.063,-37.932 -106.127,-37.932 v3(-105.936,-37.741)
  Bottom Layer w0.254: Z45.2@-136.435,-27.125 -136.435,-27.642 -135.87,-28.208 v3(-135.863,-28.208) ; Z135.2@-107.038,-37.741 v3(-105.936,-37.741)
UMB_TDI: Z47.2 Z98.1 | length 43.5
  GND w0.254: v3(-138.816,-28.061) -138.816,-29.561 -139.716,-30.461 -139.716,-32.061 -133.223,-38.555 -126.648,-38.555 -126.414,-38.788 -120.314,-38.788 -119.462,-39.64 -110.708,-39.64 ; -110.708,-39.652 -109.253,-39.652 -108.624,-40.281 v3(-105.936,-40.281)
  Bottom Layer w0.254: v3@-138.845,-27.832 Z47.2@-138.845,-27.125 ; v3(-138.816,-28.061) v3@-138.716,-28.161 ; Z98.1@-107.038,-40.281 v3(-105.936,-40.281)
UMB_TDO: Z46.2 Z136.2 | length 44.4
  GND w0.254: v3(-138.816,-25.061) -138.816,-26.072 -138.056,-26.832 -138.056,-31.641 -131.548,-38.148 -126.48,-38.148 -126.246,-38.382 -117.596,-38.382 -116.787,-39.191 -106.146,-39.191 v3(-105.966,-39.011)
  Bottom Layer w0.254: Z46.2@-138.845,-24.125 -138.845,-25.032 v3(-138.816,-25.061) ; Z136.2@-107.038,-39.011 v3(-105.966,-39.011) ; v3(-138.816,-25.061) -138.895,-25.14 v3(-138.816,-25.061)
UMB_TMS: Z44.2 Z134.2 | length 38.3
  GND w0.254: v3(-136.416,-24.961) -136.416,-26.062 -135.417,-27.061 -133.918,-27.061 -131.616,-29.363 -131.616,-29.763 -124.789,-36.591 -122.977,-36.591 -122.877,-36.69 -122.355,-36.69 -122.256,-36.591 -117.746,-36.591 ; -117.746,-36.59 -106.046,-36.59 v3(-105.926,-36.471)
  Bottom Layer w0.254: Z44.2@-136.435,-24.125 -136.435,-24.942 v3(-136.416,-24.961) ; Z134.2@-107.038,-36.471 v3(-105.926,-36.471)
UMB_TX: Z53.2 Z104.1 | length 75.6
  Top Layer w0.254: v3(-132.516,-34.961) -129.94,-37.537 v3(-129.94,-39.556)
  Bottom Layer w0.254: Z53.2@-146.075,-27.125 -146.075,-27.333 -144.791,-28.617 -144.791,-30.811 -140.641,-34.961 v3(-132.516,-34.961) ; v3(-129.94,-39.556) -129.656,-39.556 -124.27,-44.942 -115.535,-44.942 -102.641,-57.836 -95.266,-57.836 -94.541,-58.561 -94.541,-59.611 -95.216,-60.286 -100.266,-60.286 -100.806,-60.826 Z104.1@-100.806,-61.491
VBATT: R13_PM1.1 U3_PM1.2 Z49.2 Z50.2 Z78.1 Z79.1 | length 20.3
  Top Layer w0.254: v1(-120.317,-61.969) R13_PM1.1@-120.317,-60.869 ; v1(-118.539,-61.969) R13_PM1.1@-118.539,-60.869
  Top Layer w0.3: R13_PM1.1@-119.591,-60.574 -119.591,-58.574 -117.841,-56.824 U3_PM1.2@-115.441,-56.824
  Top Layer w0.762: v2(-186.641,-76.261) -178.641,-76.261 v2(-178.616,-76.236)
  Bottom Layer w0.254: v1(-143.665,-24.844) Z50.2@-143.665,-24.125 ; v1(-141.255,-27.844) Z49.2@-141.255,-27.125
  Bottom Layer w0.3: v3(-170.837,-79.605) -170.8,-79.642 Z79.1@-170.8,-80.391
  Bottom Layer w0.508: Z78.1@-170.8,-90.491 -170.8,-91.452 v2(-170.791,-91.461)
VBATT_IN: J1.1 R1.2 Z30.2 Z32.2 | length 34.8
  Top Layer w0.762: v2(-120.799,-26.136) -120.799,-27.963 -119.621,-29.141 ; v2(-118.259,-25.884) -118.259,-27.787 -119.199,-28.727 -119.208,-28.727 -119.621,-29.141 ; R1.2@-115.251,-48.076 -118.837,-48.076 J1.1@-119.621,-47.292 -119.621,-29.141
  Bottom Layer w0.457: Z32.2@-121.975,-24.125 -121.975,-24.627 -120.799,-25.803 v2@-120.799,-26.011 ; Z30.2@-119.565,-24.125 -119.565,-24.578 v2(-118.259,-25.884)
VBATT_SYS: J1.2 R1.1 R10_PM1.1 R13_PM1.2 U3_PM1.1 | length 22
  Top Layer w0.3: R13_PM1.2@-119.591,-54.074 -119.591,-55.324 -118.615,-56.3 U3_PM1.1@-115.124,-56.3 ; U3_PM1.1@-115.441,-56.324 -113.391,-56.324 -112.391,-55.324 -112.391,-52.774 R10_PM1.1@-113.391,-52.774
  Top Layer w0.762: R13_PM1.2@-119.591,-54.074 -119.621,-54.044 J1.2@-119.621,-49.832 -118.965,-49.176 R1.1@-115.251,-49.176
VVAR_TX1: R13_PM14.1 U3_PM14.2 Z9.1 | length 24.3
  Top Layer w0.3: U3_PM14.2@-157.325,-43.929 -154.925,-43.929 -153.175,-42.179 R13_PM14.1@-153.175,-40.179
  Top Layer w0.508: R13_PM14.1@-153.175,-40.179 -153.175,-38.87 -147.62,-33.315 -143.52,-33.315 v2(-141.266,-31.061)
  Bottom Layer w0.508: v2(-141.266,-31.061) -141.255,-31.05 Z9.1@-141.255,-30.125
VVAR_TX1_IN: R10_PM14.1 R13_PM14.2 U3_PM14.1 Z75.1 | length 57.8
  Top Layer w0.3: R10_PM14.1@-159.375,-47.979 -160.375,-47.979 -160.375,-45.429 -159.375,-44.429 U3_PM14.1@-157.325,-44.429 ; U3_PM14.1@-157.325,-44.4 -154.204,-44.4 -153.175,-45.429 R13_PM14.2@-153.175,-46.679
  Top Layer w0.508: v2@-162.716,-49.261 -154.291,-49.261 -153.175,-48.145 R13_PM14.2@-153.175,-46.679
  Bottom Layer w0.508: Z75.1@-164.8,-80.391 -164.8,-75.977 -166.616,-74.161 -166.616,-65.186 -164.541,-63.111 -164.541,-50.636 v2@-163.016,-49.111
  other v2: -162.991,-49.361
VVAR_TX2: R13_PM15.1 U3_PM15.2 Z8.1 | length 37.4
  Top Layer w0.3: U3_PM15.2@-157.425,-55.329 -155.025,-55.329 -153.275,-53.579 R13_PM15.1@-153.275,-51.579
  Top Layer w0.508: R13_PM15.1@-153.275,-51.579 -153.275,-49.954 -151.169,-47.847 -151.169,-38.164 -146.981,-33.976 -141.771,-33.976 v2(-138.856,-31.061)
  Bottom Layer w0.508: v2(-138.856,-31.061) -138.845,-31.05 Z8.1@-138.845,-30.125
VVAR_TX2_IN: R10_PM15.1 R13_PM15.2 U3_PM15.1 Z77.1 | length 45.9
  Top Layer w0.3: R10_PM15.1@-159.475,-59.379 -160.475,-59.379 -160.475,-56.829 -159.475,-55.829 U3_PM15.1@-157.425,-55.829 ; U3_PM15.1@-157.425,-55.8 -154.304,-55.8 -153.275,-56.829 R13_PM15.2@-153.275,-58.079
  Top Layer w0.508: v2(-167.791,-79.411) -163.248,-74.867 -163.248,-61.432 -162.402,-60.586 -154.391,-60.586 -153.275,-59.47 R13_PM15.2@-153.275,-58.079
  Bottom Layer w0.508: Z77.1@-167.8,-80.391 -167.791,-80.382 v2(-167.791,-79.411)
pads on no net: CSC.E1 CSC.E2 CSC.E3 CSC.E4 J8.M1 J8.M2 J9.M1 J9.M2 J10.M1 J10.M2 TR1.10 TR1.11 TR2.63 TR2.64 U2.1 U2.2 U2.6 U2.7 U2.8 Z10.1 Z11.1 Z12.1 Z13.1 Z14.1 Z15.1 Z16.1 Z17.1 Z18.1 Z19.1 Z20.1 Z29.2 Z61.2 Z62.2 Z102.1 Z105.1 Z106.1 Z148.2 Z149.2 Z150.2 Z151.2 Z152.2 Z153.2
copper on no net:
  other v1: -32.966,-84.711

## Polygon pours and split planes (outlines as drawn)
GND on GND "GND-No Net" (solid, remove dead copper, pour order 6): -195.25,-101.313 -195.237,-101.3 -3.237,-101.3 -3.237,-10.84 -3.416,-10.661 -7.516,-6.561 -8.116,-6.561 -11.39,-6.561 -11.816,-6.987 -11.842,-6.961 -195.316,-6.961
VBATT on POWER (split plane): -117.393,-77.979 -169.266,-77.979 -169.305,-77.987 -169.338,-78.009 -169.36,-78.042 -169.368,-78.081 -169.368,-92.33 -172.539,-92.33 -172.539,-77.286 -172.547,-77.247 -172.569,-77.214 -172.602,-77.192 -172.641,-77.184 -179.339,-77.184 -179.339,-75.389 -121.741,-75.389 -121.702,-75.381 -121.669,-75.359 -121.647,-75.326 -121.639,-75.287 -121.639,-60.413 -117.393,-60.413
3V3_CSC on POWER (split plane): -3.747,-100.803 -30.614,-100.803 -30.614,-73.911 -30.614,-72.661 -30.622,-72.622 -30.644,-72.589 -30.677,-72.567 -30.716,-72.559 -107.864,-72.559 -107.864,-42.986 -107.872,-42.947 -107.894,-42.914 -107.927,-42.892 -107.966,-42.884 -124.374,-42.884 -124.374,-36.161 -124.382,-36.122 -124.404,-36.089 -124.437,-36.067 -124.476,-36.059 -163.979,-36.059 -164.018,-36.067 -164.051,-36.089 -164.073,-36.122 -164.081,-36.161 -164.081,-51.148 -167.814,-51.148 -167.814,-33.403 -3.747,-33.403
VBATT on POWER (split plane): -140.118,-25.478 -140.118,-28.294 -140.683,-28.859 -141.949,-28.859 -144.664,-26.144 -144.664,-22.811 -144.672,-22.772 -144.694,-22.739 -144.727,-22.717 -144.766,-22.709 -193.366,-22.709 -193.405,-22.717 -193.438,-22.739 -193.46,-22.772 -193.468,-22.811 -193.468,-75.286 -193.46,-75.325 -193.438,-75.358 -193.405,-75.38 -193.366,-75.388 -185.918,-75.388 -185.918,-77.184 -194.753,-77.184 -194.753,-21.588 -144.008,-21.588
3V3_BUS on POWER (split plane): 152 vertices, not listed, extent -194.754,-100.803 -3.746,-7.496
no net on InternalPlane2 (split plane): -187.25,-7.497 -11.264,-7.497 -11.265,-7.532 -11.25,-7.538 -11.25,-7.497 -11.25,-7.538 -11.25,-7.497 -11.232,-7.496 -10.882,-7.504 -10.514,-7.531 -10.149,-7.576 -9.786,-7.639 -9.426,-7.72 -9.071,-7.818 -8.722,-7.934 -8.378,-8.066 -8.041,-8.216 -7.712,-8.381 -7.392,-8.563 -7.081,-8.76 -6.779,-8.972 -6.489,-9.199 -6.21,-9.439 -5.943,-9.693 -5.689,-9.96 -5.449,-10.239 -5.222,-10.529 -5.01,-10.831 -4.813,-11.142 -4.631,-11.462 -4.466,-11.791 -4.316,-12.128 -4.184,-12.472 -4.068,-12.821 -3.97,-13.176 -3.889,-13.536 -3.826,-13.899 -3.781,-14.264 -3.754,-14.632 -3.746,-14.982 -3.747,-15 -3.747,-100.803 -194.753,-100.803 -194.753,-15 -194.754,-14.982 -194.746,-14.632 -194.719,-14.264 -194.674,-13.899 -194.611,-13.536 -194.53,-13.176 -194.432,-12.821 -194.316,-12.472 -194.184,-12.128 -194.034,-11.791 -193.869,-11.462 -193.687,-11.142 -193.49,-10.831 -193.278,-10.529 -193.051,-10.239 -192.811,-9.96 -192.557,-9.693 -192.29,-9.439 -192.011,-9.199 -191.721,-8.972 -191.419,-8.76 -191.108,-8.563 -190.788,-8.381 -190.459,-8.216 -190.122,-8.066 -189.778,-7.934 -189.429,-7.818 -189.074,-7.72 -188.714,-7.639 -188.351,-7.576 -187.986,-7.531 -187.618,-7.504 -187.268,-7.496

## Keep-outs
Keep-Out Layer:
  lines w0.025: -195.263,-15 cw(c-187.25,-15) -187.25,-6.987 -11.25,-6.987 ; -195.263,-15 -195.263,-15 ; -195.263,-15 -195.263,-101.3 ccw(c-195.25,-101.3) -195.25,-101.313 -3.25,-101.313 ccw(c-3.25,-101.3) -3.237,-101.3 -3.237,-15 ccw(c-11.25,-15) -11.25,-6.987 ; -11.25,-6.987 ccw(c-11.25,-7) -11.25,-6.987 ; -11.25,-6.987 ccw(c-11.25,-15) -11.25,-6.987 ; -11.25,-6.987 ccw(c-11.25,-7) -11.25,-6.987 ; -11.25,-6.987 -11.25,-6.987

## Other copper
POWER (plane layer: these items are gaps in the copper):
  lines w0.2: -195.263,-21.486 -143.966,-21.486 -140.016,-25.436 -140.016,-28.336 -140.641,-28.961 -141.991,-28.961 -144.766,-26.186 -144.766,-22.811 -175.016,-22.811 -193.366,-22.811 -193.366,-75.286 -185.816,-75.286 -185.816,-77.286 -195.191,-77.286 ; -139.612,-31.236 -138.506,-31.236 ; -124.476,-33.301 -3.237,-33.301 ; -124.228,-33.301 -167.916,-33.301 -167.916,-51.25 -163.979,-51.25 -163.979,-36.161 -124.476,-36.161 -124.476,-42.986 -107.966,-42.986 -107.966,-72.661 -30.716,-72.661 -30.716,-73.911 -30.716,-101.313 ; -179.441,-77.286 -179.441,-75.287 -172.641,-75.287 -121.741,-75.287 -121.741,-60.311 -117.291,-60.311 -117.291,-78.081 -169.266,-78.081 -169.266,-92.432 -172.641,-92.432 -172.641,-77.286 -172.743,-77.286 -179.441,-77.286

## Silkscreen, mask and mechanical layers (free items; w line width, h text height)
Top Overlay:
  circle w0.3: c-159.328,-29.267 r6.25
  lines w0.2: -163.611,-34.794 cw(c-156.828,-29.267) -163.488,-23.593 ; -163.317,-36.437 cw(c-153.078,-29.267) -163.317,-22.097 ; -189.216,-27.661 -189.216,-25.661 -185.716,-25.661 -185.716,-27.661 -189.216,-27.661 ; -189.216,-25.161 -185.716,-25.161 -185.716,-23.161 -189.216,-23.161 -189.216,-25.161 ; -188.716,-36.161 -188.716,-32.661 -186.716,-32.661 -186.716,-36.161 -188.716,-36.161 ; -187.466,-31.911 -187.466,-28.411 -182.716,-28.411 -182.716,-31.911 -187.466,-31.911 ; -186.216,-36.161 -186.216,-32.661 -184.216,-32.661 -184.216,-36.161 -186.216,-36.161 ; -184.716,-27.661 -181.216,-27.661 -181.216,-25.661 -184.716,-25.661 -184.716,-27.661 ; -184.716,-25.161 -181.216,-25.161 -181.216,-23.161 -184.716,-23.161 -184.716,-25.161 ; -183.716,-36.161 -183.716,-32.661 -181.716,-32.661 -181.716,-36.161 -183.716,-36.161 ; -180.716,-36.161 -175.5,-36.161 -175.5,-23.161 -180.716,-23.161 -180.716,-36.161
  lines w0.4: -163.658,-31.767 -159.328,-34.267 -154.997,-31.767 ; -163.658,-31.767 -163.658,-26.767 -159.328,-24.267 ; -163.658,-31.767 -159.328,-29.267 ; -159.328,-29.267 -154.997,-31.767 ; -159.328,-29.267 -159.328,-24.267 ; -159.328,-24.267 -154.997,-26.767 -154.997,-31.767
  text "R14" at -188.716,-24.661 h1.02
  text "R15" at -184.216,-24.661 h1.02
  text "R16" at -188.716,-27.161 h1.02
  text "R17" at -184.216,-27.161 h1.02
  text "BLUESAT" at -151.25,-28.75 h4
  text "R13" at -177.5,-30.75 h1.02 r90
  text "U3" at -184.716,-30.911 h1.02 r90
  text "Tray 2 Mobo          2013" at -151.328,-31.767 h4
  text "PM TEMPLATE" at -191.216,-34.911 h1.02 r90
  text "R12" at -187.216,-35.661 h1.02 r90
  text "R10" at -184.716,-35.661 h1.02 r90
  text "R11" at -182.216,-35.661 h1.02 r90
  text "+" at -113.5,-65.25 h1.02
  text "1" at -46.23,-81.07 h0.76
  text "0" at -46.23,-83.102 h0.76
  text "EINT0" at -114,-84 h1.02
  text "BLUESAT" at -96.75,-88.5 h4
  text "CSC/Comms 2.x" at -96.828,-91.517 h4
  text "1WIRE" at -98.216,-98.661 h1.52
  text "1WIRE" at -70.216,-98.661 h1.52
  text "1WIRE" at -42.216,-98.661 h1.52
  text "1WIRE" at -14.216,-98.661 h1.52
  text "+" at -103.5,-100.5 h1.02
  text "+" at -75.5,-100.5 h1.02
  text "+" at -47.5,-100.5 h1.02
  text "+" at -19.5,-100.5 h1.02
Mechanical 5:
  lines w0.025: -3.25,-101.3 -195.25,-101.3 -195.25,-15 ; -3.25,-15 ccw(c-11.25,-15) -11.25,-7 -187.25,-7 ccw(c-187.25,-15) -195.25,-15 ; -195.25,-15 -195.25,-15

## Text inside footprints (layer, text, board x,y; h text height)
CSC: Top Overlay "TX1" at -18.304,-35.333 h1.52; Top Overlay "TX2" at -18.812,-37.873 h1.52; Top Overlay "RX1" at -18.304,-40.413 h1.52; Top Overlay "RX2" at -18.812,-42.953 h1.52; Top Overlay "G_TX1" at -21.352,-45.493 h1.52; Top Overlay "G_TX2" at -21.86,-48.033 h1.52; Top Overlay "G_RX1" at -21.352,-50.573 h1.52; Top Overlay "G_RX2" at -21.86,-53.113 h1.52; Top Overlay "1" at -15.256,-56.669 h1.02; Top Overlay "11" at -15.764,-69.369 h1.02; Top Overlay "21" at -16.018,-82.069 h1.02; Top Overlay "5V0" at -102.661,-64.666 h1.52; Top Overlay "CTS" at -102.661,-67.206 h1.52; Top Overlay "GND" at -102.661,-69.746 h1.52; Top Overlay "DTR" at -102.661,-57.046 h1.52; Top Overlay "RXI" at -102.661,-59.586 h1.52; Top Overlay "TXO" at -102.661,-62.126 h1.52
J8: Mechanical 15 "EDGE OF BOARD" at -169.094,-102.054 h0.5
J9: Mechanical 15 "EDGE OF BOARD" at -148.044,-102.054 h0.5
J10: Mechanical 15 "EDGE OF BOARD" at -127.544,-102.054 h0.5